# Allegro board LAYOUT.brd
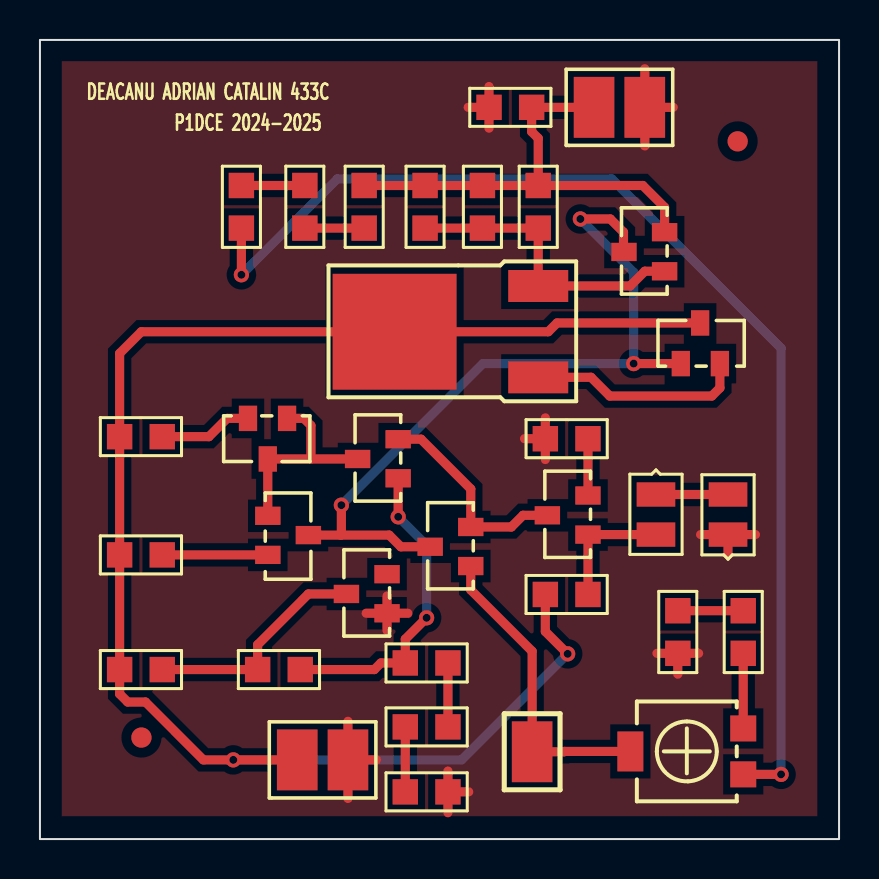
[diagram p0: board, top side]
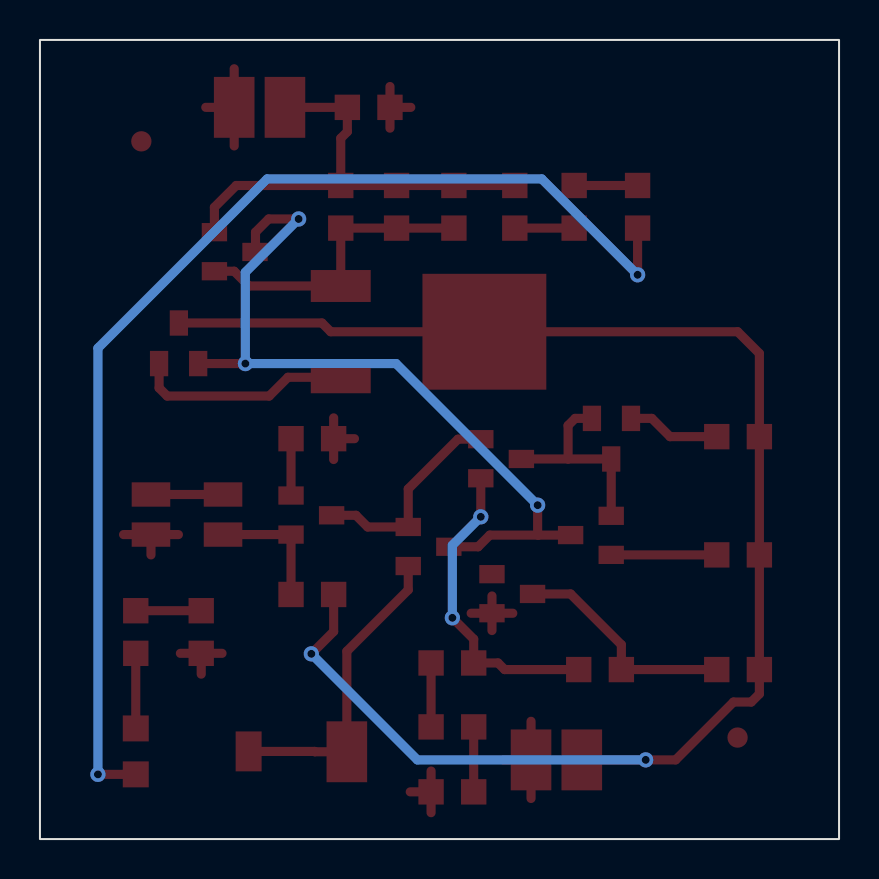
[diagram p1: board, bottom side, seen from below]

Outline 40 x 40 mm; copper layers: TOP, BOTTOM. Coordinates in mm from the lower left corner of the outline.
Outline path: rectangle 0,0 40,40

## Placement (name value [footprint] x y rotation side)
D1  BZX84-C5V1  [TO236]  17.25 11.3 0 top
D2  D1N4148  [SMD0805]  30.84 17.25 270 top
D3  D1N4148  [SMD0805]  34.44 15.24 90 top
J1  CON1  [J1]  24.64 4.37 0 top
NOREF  -  []  0 0 0 top
NOREF#2  -  []  0 40 0 top
NOREF#3  -  [unnamed#2]  34.92 34.92 0 top
NOREF#4  -  []  0 0 90 top
NOREF#5  -  []  40 0 90 top
NOREF#6  -  [unnamed#2]  5.08 5.08 0 top
P1  2k  [TS53YL]  35.2 5.54 0 top
Q2  QBC817-25  [TO236]  17.81 18.06 0 top
Q3  QBC817-25  [TO236]  21.44 13.67 0 top
Q4  QBC807-25  [TO236]  11.53 16.18 180 top
Q5  QBC817-25  [TO236]  27.3 15.24 0 top
Q6  QBC846B  [TO236]  31.14 28.42 0 top
Q7  QBC807-25  [TO236]  12.37 20.93 90 top
QESR  QBC846B  [TO236]  32.08 23.93 270 top
QESR2  QMJD31C  [DPACK]  24.94 23.11 90 top
R2  510  [SMR0805]  6.12 8.48 180 top
R6  3.3K  [SMR0805]  16.23 32.72 270 top
R9  100  [SMR0805]  35.2 9.3 90 top
R10  220  [SMR0805]  6.12 20.14 180 top
R11  220  [SMR0805]  6.12 14.22 180 top
R12  1K  [SMR0805]  13.26 30.58 90 top
R29  100K  [SMR0805]  10.9 8.48 0 top
R30  47k  [SMR0805]  18.29 8.81 0 top
R31  100  [SMR0805]  27.43 20.04 180 top
R32  510  [SMR0805]  25.3 12.24 0 top
R33  220  [SMR0805]  10.08 32.72 270 top
R34  1K  [SMR0805]  31.93 11.43 270 top
R35  3.9k  [SMR0805]  20.42 5.61 180 top
R36  100  [SMR0805]  18.29 2.36 0 top
RC2  0.47  [SMR0805]  24.94 30.58 90 top
RC3  0.47  [SMR0805]  22.15 30.58 90 top
RC4  0.47  [SMR0805]  19.28 30.58 90 top
RLOAD  510  [SMR0805]  24.61 36.63 180 top
VIN  CON2  [JUMPER2]  12.88 3.96 0 top
VO  CON2  [JUMPER2]  27.74 36.63 0 top

## Library data of the parts
D1 = BZX84-C5V1_0
D2 D3 = D1N4148_0
J1 = CON1
P1 = POT
Q2 Q3 Q5 = QBC817-25_0
Q4 Q7 = QBC807-25_0
Q6 QESR = QBC846B_0
QESR2 = QMJD31C_0
R2 R6 R9-R12 R29-R36 RC2-RC4 RLOAD = R
VIN VO = CON2: User Part Number: ***

## Footprints (pads in the part's own frame, mm; a bottom-side part is the same pattern mirrored in y, then rotated)
DPACK
  rect 1.6x3 smd: 1(0,0) 3(4.57,0)
  rect 5.8x6.2 smd: 2(2.28,7.19)
J1
  rect 2.032x3.048 smd: 1(0,0)
JUMPER2
  rect 2.032x3.048 smd: 1(0,0) 2(2.54,0)
SMD0805
  rect 1.219x1.93 smd: A(2.007,0) C(0,0)
SMR0805
  rect 1.27x1.27 smd: 1(0,0) 2(2.134,0)
TO236
  rect 1.27x0.914 smd: 1(0.127,0) 2(0.127,1.956) 3(-1.905,0.965)
TS53YL
  rect 1.3x1.3 smd: 1(0,0) 3(0,-2.3)
  rect 1.3x2 smd: 2(-5.65,-1.15)
unnamed#2
  round 1.016 smd: (0,0)

## Nets
VCC: QESR.3 QESR2.2 R2.2 R10.2 R11.2 R32.1 VIN.1
0: D1.1 D3.C R31.2 R34.2 R36.2 RLOAD.2 VIN.2 VO.2
OUT: Q6.2 R6.1 RC2.2 RC3.2 RC4.2 RLOAD.1 VO.1
N182717: R30.2 R35.1
N182723: Q2.1 R29.2 R30.1
N182795: D1.3 R2.1 R29.1
N182999: R6.2 R12.1
N183005: R12.2 R33.1
N183085: Q6.1 QESR2.3 RC2.1 RC3.1 RC4.1
N183091: Q3.3 Q4.3 Q6.3 QESR.1
N183201: J1.1 P1.2(T) Q3.1
N183251: R9.2 R34.1
N183273: Q2.3 Q4.1 Q7.1 Q7.3
N183545: Q7.2 R10.1
N183551: Q4.2 R11.1
N183595: Q2.2 Q3.2 Q5.3
N183705: P1.1 R9.1
N186468: Q5.2 R31.1
N186699: D2.A Q5.1 R32.2
N187381: P1.3(2) R33.2
N280109: QESR.2 QESR2.1
N281104: D2.C D3.A
N283464: R35.2 R36.1

Pads without a net: D1 2

## Via types
v1: diameter 0.762, hole 0.4, TOP to BOTTOM, 9 vias

## Routing (per net, layer and track width the routed paths; a pad name or vN(x,y) marks a point on that pad's centre or on a via; arc(x,y) is an arc through that point)
VCC: length 79.4
  TOP w0.457: v1(26.42,9.27) 25.3,10.39 R32.1 ; VIN.1 v1(9.68,3.96) 8.18,3.96 5.28,6.86 4.39,6.86 3.99,7.26 R2.2 R11.2 R10.2 3.99,24.31 5.07,25.39 QESR2.2 25.44,25.39 25.88,25.83 QESR.3
  BOTTOM w0.457: v1(9.68,3.96) 21.11,3.96 v1(26.42,9.27)
0: length 30.6
  TOP w0.457: 30.89,9.3 R34.2 ; R34.2 31.93,8.25 ; R34.2 32.97,9.3 ; 16.33,11.3 D1.1 ; D1.1 17.37,10.44 ; D1.1 17.37,12.17 ; D1.1 18.42,11.3 ; 30.28,34.7 VO.2 ; VO.2 31.7,36.63 ; VO.2 30.28,38.56 ; 15.42,2.03 VIN.2 ; VIN.2 15.42,5.89 ; VIN.2 16.84,3.96 ; 22.48,35.58 RLOAD.2 ; RLOAD.2 21.44,36.63 ; RLOAD.2 22.48,37.67 ; 25.3,19 R31.2 ; R31.2 25.3,21.08 ; R31.2 24.26,20.04 ; D3.C 35.81,15.24 ; D3.C 34.44,14.22 ; D3.C 33.07,15.24 ; R36.2 20.42,3.4 ; R36.2 21.46,2.36 ; R36.2 20.42,1.32
OUT: length 23.9
  TOP w0.457: RC2.2 24.94,35.08 24.61,35.41 RLOAD.1 VO.1 ; RC2.2 RC3.2 RC4.2 R6.1 ; RC2.2 30.18,32.72 31.27,31.62 Q6.2
N182717: length 3.2
  TOP w0.457: R30.2 R35.1
N182723: length 15.7
  TOP w0.457: v1(19.35,11.07) 18.29,10.01 R30.1 17.07,8.81 16.74,8.48 R29.2 ; v1(17.93,16.13) Q2.1
  BOTTOM w0.457: v1(19.35,11.07) 19.35,14.71 v1(17.93,16.13)
N182795: length 11.5
  TOP w0.457: R2.1 R29.1 10.9,9.73 13.44,12.27 D1.3
N182999: length 3
  TOP w0.457: R12.1 R6.2
N183005: length 3.2
  TOP w0.457: R12.2 R33.1
N183085: length 15.2
  TOP w0.457: RC4.1 RC3.1 RC2.1 QESR2.3 29.54,27.68 30.28,28.42 Q6.1
N183091: length 39.6
  TOP w0.457: v1(15.09,16.71) 15.09,15.24 15.06,15.21 ; v1(27.05,31.04) 28.55,31.04 29.21,30.38 29.21,29.41 Q6.3 ; 15.06,15.21 17.48,15.21 18.07,14.63 Q3.3 ; 15.06,15.21 Q4.3 ; QESR.1 v1(29.72,23.8)
  BOTTOM w0.457: v1(27.05,31.04) 29.72,28.37 v1(29.72,23.8) 22.17,23.8 v1(15.09,16.71)
N183201: length 15.5
  TOP w0.457: P1.2 26.26,4.39 26.24,4.37 J1.1 24.64,9.4 21.56,12.47 Q3.1
N183251: length 3.3
  TOP w0.457: R34.1 R9.2
N183273: length 10.4
  TOP w0.457: 13.56,19.02 Q7.3 Q4.1 ; 13.56,19.02 Q2.3 ; 13.56,19.02 13.56,20.7 13.21,21.06 Q7.1
N183545: length 4.7
  TOP w0.457: Q7.2 9.37,21.06 8.46,20.14 R10.1
N183551: length 5.3
  TOP w0.457: R11.1 Q4.2
N183595: length 10.6
  TOP w0.457: Q2.2 19.08,20.02 21.56,17.53 Q3.2 23.6,15.62 24.18,16.21 Q5.3
N183705: length 3.8
  TOP w0.457: R9.1 P1.1
N186468: length 2.8
  TOP w0.457: R31.1 Q5.2
N186699: length 6.4
  TOP w0.457: R32.2 Q5.1 D2.A
N187381: length 58.1
  TOP w0.457: P1.3 v1(37.1,3.24) ; v1(10.08,28.24) R33.2
  BOTTOM w0.457: v1(10.08,28.24) 14.88,33.05 28.63,33.05 37.1,24.57 v1(37.1,3.24)
N280109: length 10.9
  TOP w0.457: QESR.2 34.04,22.58 33.63,22.17 28.52,22.17 27.58,23.11 QESR2.1
N281104: length 3.6
  TOP w0.457: D2.C D3.A
N283464: length 3.3
  TOP w0.457: R35.2 R36.1

## Copper pours and planes (outline as drawn; the poured copper is in the pictures)
0 on TOP: 1.09,38.94 1.09,1.14 38.91,1.14 38.91,38.94 ; 3 cut-outs

## Text on the board
Ref Des/Silkscreen Top: DEACANU ADRIAN CATALIN 433C | P1DCE 2024-2025
XSECTION_CHART: *  SURFACE - AIR 0 MIL | L1: TOP CONDUCTOR - COPPER 0.71 MIL | *  DIELECTRIC - FR-4 61.57 MIL | L2: BOTTOM CONDUCTOR - COPPER 0.71 MIL | DESIGN CROSS SECTION CHART | ___________________________ | TOTAL THICKNESS 62.99 MIL | 1-2 | FIGURE | SIZE | 15.74 | DRILL CHART: TOP to BOTTOM | ALL UNITS ARE IN MILS | PLATED | QTY | 9
